# Altium PCB ControllerBoardV2PCB.PcbDoc
Units mm, origin at the board's own origin, x right, y up, seen from the top; angles counter-clockwise.
Board outline 55 x 90 mm, 2 copper layers (Top Layer, Bottom Layer); 39 components, 55 nets, 251 pads, 4 vias.
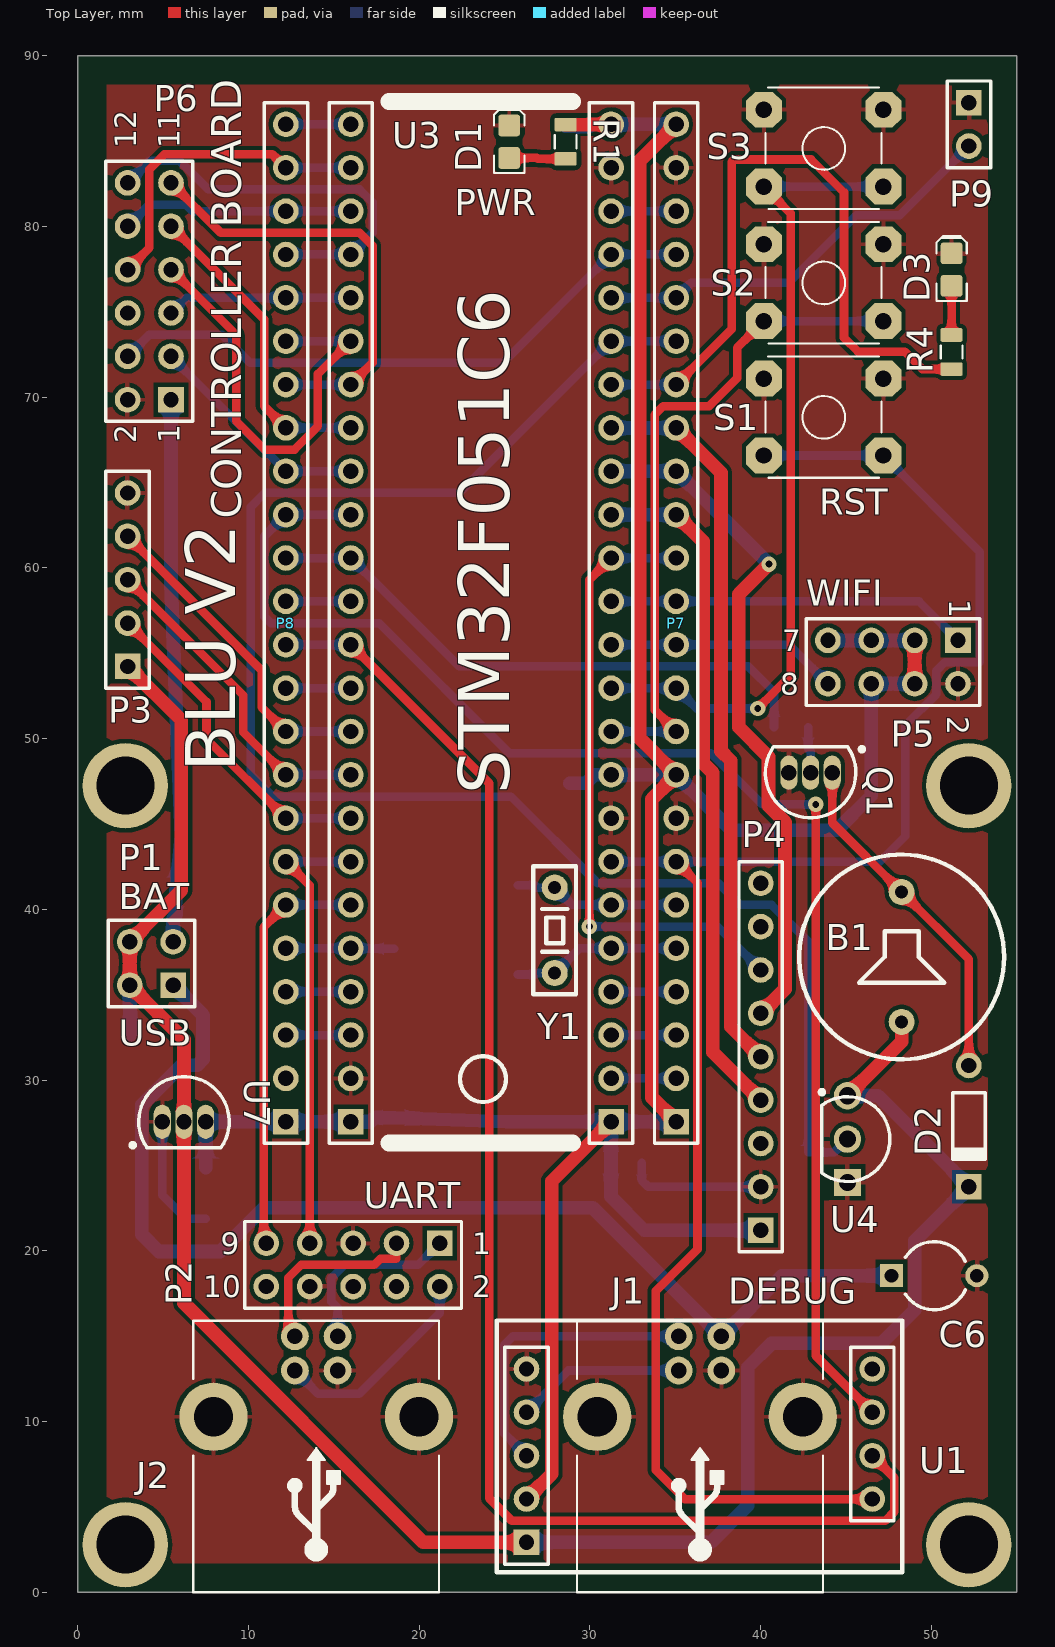
[diagram p0: Top Layer view]
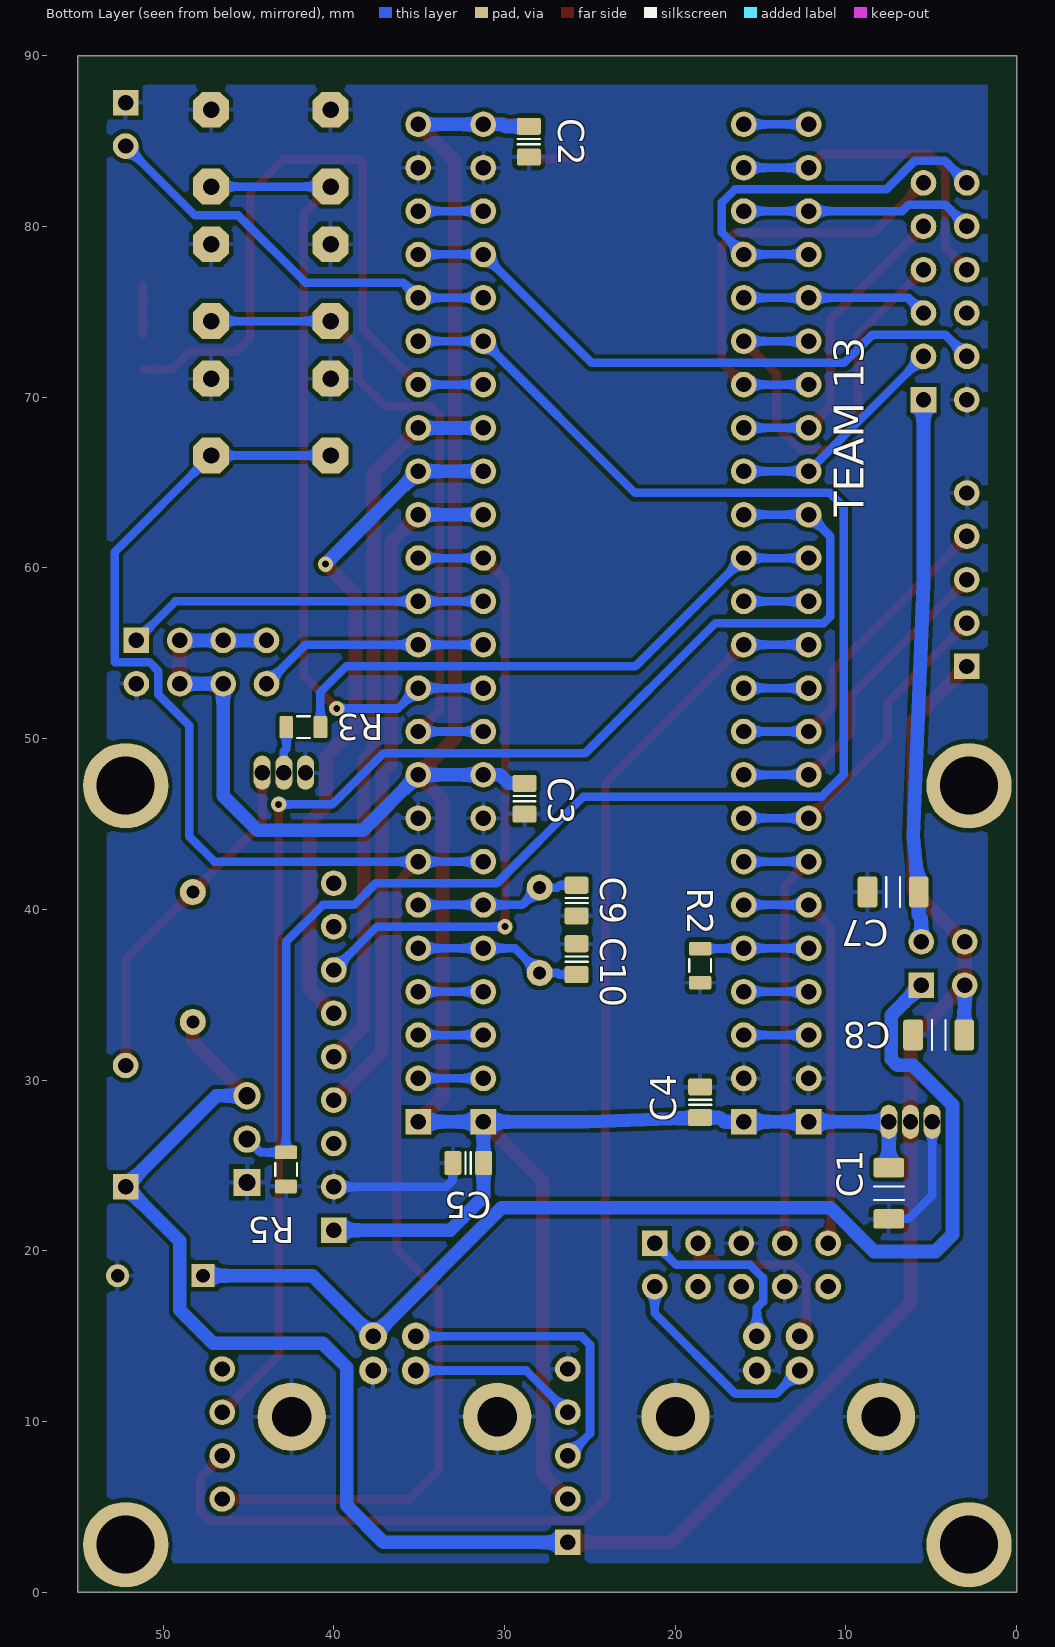
[diagram p1: Bottom Layer view, seen from below]

## Layer stack, top to bottom
Top Solder: solder mask 0.0102, Solder Resist, Dk 3.5
Top Layer: signal copper 0.0356
Dielectric 1: dielectric 0.32, FR-4, Dk 4.8
Bottom Layer: signal copper 0.0356
Bottom Solder: solder mask 0.0102, Solder Resist, Dk 3.5

## Board outline
0,0 55,0 55,90 0,90

## Design rules (kind name [scope] priority, off if disabled: settings)
Clearance [All] p1: gap=0.25
PolygonConnect [All] p1: connectstyle=Relief reliefconductorwidth=0.254 reliefentries=4 polygonreliefangle="90 Angle" airgapwidth=0.254
RoutingVias [All] p1: holewidth=0.4 width=0.9 viastyle="Through Hole" minholewidth=0.711 minwidth=1.27 maxholewidth=0.711 maxwidth=1.27
SMDNeckDown [All] p1: percent=100.000
SolderMaskExpansion [All] p1: expansion=0.102
Width Width_1 [(InNet('3V3') OR InNet('5V') OR InNet('5VPB') OR InNet('5VUSB') OR InNet('SPI2_CLK') OR InNet('SPI2_MISO') OR InNet('SPI2_MOSI'))] p1: maxlimit=1.5 minlimit=0.5 preferedwidth=0.8 minimp=50.000000 maximp=50.000000 favimp=50.000000
Width [All] p2: maxlimit=1.5 minlimit=0.3 preferedwidth=0.5 minimp=50.000000 maximp=50.000000 favimp=50.000000
30 further rules are at their usual default settings.

## Components (designator, comment, footprint, x,y, rotation, side; value= is the part's Value field where it differs from the comment)
B1 "BUZZER" HCM1206UX-G 48.26,37.211 r270 top
C1 "approved sub OK" CAPC3216X180N 7.493,23.368 r270 bottom
C2 "approved sub OK" CAPC2012X135N 28.575,84.963 r270 bottom
C3 "approved sub OK" CAPC2012X135N 28.829,46.482 r270 bottom
C4 "approved sub OK" CAPC2012X135N 18.542,28.702 r90 bottom
C5 "approved sub OK" CAPC2012X135N 32.131,25.146 r0 bottom
C6 "10µ" CAPR5-4X5 50.165,18.542 r0 top
C7 "approved sub OK" CAPC3216X180N 7.239,41.021 r0 bottom
C8 "approved sub OK" CAPC3216X180N 4.572,32.639 r0 bottom
C9 "approved sub OK" CAPC2012X135N 25.781,40.513 r270 bottom
C10 "approved sub OK" CAPC2012X135N 25.781,37.084 r90 bottom
D1 "3V3LED" LED-0805-K 25.273,84.963 r90 top
D2 "Diode 1N4448" DO-35 52.197,27.305 r270 top
D3 "INDLED" LED-0805-K 51.181,77.47 r90 top
J1 "USB-B - UART" USB_TypeB_Tyco 36.449,0 r90 top
J2 "USB-B - UART" USB_TypeB_Tyco 13.97,0 r90 top
P1 "POWER_HEADER" HDR2X2 5.588,35.56 r90 top
P2 "MCPUSBUART_HEADER" HDR2X5 21.209,20.447 r180 top
P3 "LNS_HEADER" HDR1X5 2.921,54.229 r90 top
P4 "GYRO_HEADER" HDR1X9 40.005,21.209 r90 top
P5 "WIFI_HEADER" HDR2X4 51.562,55.753 r180 top
P6 "POWERBOARD_HEADER" HDR2X6 5.461,69.85 r90 top
P7 "BREAKOUT_HEADER_LEFT" HDR1X24 35.052,27.559 r90 top
P8 "BREAKOUT_HEADER_RIGHT" HDR1X24 12.192,27.559 r90 top
P9 "LIGHTSENSOR_HEADER" HDR1X2 52.197,87.249 r270 top
Q1 "NPN" TO-226-AA 42.926,48.006 r90 top
R1 "Thick Film" RESC2012X70N 28.575,84.963 r270 top
R2 "Thick Film" RESC2012X70N 18.542,36.703 r90 bottom
R3 "Thick Film" RESC2012X70N 41.783,50.673 r0 bottom
R4 "Thick Film" RESC2012X70N 51.181,72.644 r90 top
R5 "Thick Film" RESC2012X70N 42.799,24.765 r270 bottom
S1 "SW_THT_PB_7.0mm" TACT-SWITCH-TS1170 43.688,68.834 r180 top
S2 "SW_THT_PB_7.0mm" TACT-SWITCH-TS1170 43.688,76.708 r180 top
S3 "SW_THT_PB_7.0mm" TACT-SWITCH-TS1170 43.688,84.582 r180 top
U1 "STM32F0DebuggerHdr" STM32F051C6_DbgrHdr 26.289,2.921 r180 top
U3 "STM32F051C6 Breakout Board" STM32F051C6BreakoutBoard 31.242,27.559 r90 top
U4 "LM35WidePin" TO-92Wide 45.085,26.543 r270 top
U7 "MCP1702-3302E/TO" TO-92-TO3 6.223,27.559 r270 top
Y1 "8MHz" 8MHZOSC 27.94,41.275 r270 top

## Footprints (in the part's own frame and the unit in brackets; to place one, negate y for a bottom-side part, rotate by r counter-clockwise, add the part's x,y. Pads: shape width x height; smd on the part's side, far side on the other; paste and mask are expansions set on the pad)
8MHZOSC [mil]
  round 60 hole 30: 1(196.85,0) 2(0,0)
  silkscreen extent -49,-49 246,49
CAPC2012X135N [mm] "Chip Capacitor, Body 2.0x1.2mm, EIA 0805, IPC Medium Density"
  round 0.254 on Mech15: 0(0,0)
  rrect25% 1x1.4 smd: 1(-0.9,0) 2(0.9,0)
  Top Layer pour cut-out: -0.675,0.7 -0.475,0.9 0.475,0.9 0.675,0.7 0.675,-0.7 0.475,-0.9 -0.475,-0.9 -0.675,-0.7
  silkscreen extent -0.15,-0.65 0.15,0.65, body extent -1.1,-0.72 1.1,0.73, height 1.34
CAPC3216X180N [mm] "Chip Capacitor, Body 3.2x1.6mm, 1.8mm H, EIA 1206, IPC Medium Density"
  round 0.508 on Mech15: 0(0,0)
  rrect25% 1.15x1.8 smd: 1(-1.5,0) 2(1.5,0)
  silkscreen extent -0.4,-0.88 0.4,0.88, body extent -1.7,-0.9 1.7,0.9, height 1.8
CAPR5-4X5 [mm] "Capacitor; 2 Leads"
  rect 1.35x1.35 hole 0.8: 1(-2.5,0)
  round 1.35 hole 0.8: 2(2.5,0)
  silkscreen extent -1.69,-2 1.82,2
DO-35 [mm] "Diode, Axial; Body 3.8 x 1.9 mm (LxDia. max), Lead Dia. 0.53 mm (max)"
  round 1.5 hole 0.9: 1(-3.55,0)
  rect 1.5x1.5 hole 0.9: 2(3.55,0)
  silkscreen extent -1.95,-0.95 2.05,0.95
HCM1206UX-G [mil]
  round 60 hole 30: 0(-149.61,0) 1(149.61,0)
  silkscreen extent -236,-236 236,236
HDR1X2 [mm] "Connector; Header; 2 Position"
  rect 1.5x1.5 hole 0.9: 1(0,0)
  round 1.5 hole 0.9: 2(2.54,0)
  silkscreen extent -1.27,-1.27 3.81,1.27
HDR1X5 [mm] "Connector; Header; 5 Position"
  rect 1.5x1.5 hole 0.9: 1(0,0)
  round 1.5 hole 0.9: 2(2.54,0) 3(5.08,0) 4(7.62,0) 5(10.16,0)
  silkscreen extent -1.27,-1.27 11.43,1.27
HDR1X9 [mm] "Connector; Header; 9 Position"
  rect 1.5x1.5 hole 0.9: 1(0,0)
  round 1.5 hole 0.9: 2(2.54,0) 3(5.08,0) 4(7.62,0) 5(10.16,0) 6(12.7,0) 7(15.24,0) 8(17.78,0) 9(20.32,0)
  silkscreen extent -1.27,-1.27 21.59,1.27
HDR1X24 [mm] "Connector; Header; 24 Position"
  rect 1.5x1.5 hole 0.9: 1(0,0)
  round 1.5 hole 0.9: 2(2.54,0) 3(5.08,0) 4(7.62,0) 5(10.16,0) 6(12.7,0) 7(15.24,0) 8(17.78,0) 9(20.32,0) 10(22.86,0) 11(25.4,0) 12(27.94,0) 13(30.48,0) 14(33.02,0) 15(35.56,0) 16(38.1,0) 17(40.64,0) 18(43.18,0) 19(45.72,0) 20(48.26,0) 21(50.8,0) 22(53.34,0) 23(55.88,0) 24(58.42,0)
  silkscreen extent -1.27,-1.27 59.69,1.27
HDR2X2 [mm] "Connector; Header; 2x2 Position"
  rect 1.5x1.5 hole 0.9: 1(0,0)
  round 1.5 hole 0.9: 2(0,2.54) 3(2.54,0) 4(2.54,2.54)
  silkscreen extent -1.27,-1.27 3.81,3.81
HDR2X4 [mm] "Connector; Header; 4x2 Position"
  rect 1.5x1.5 hole 0.9: 1(0,0)
  round 1.5 hole 0.9: 2(0,2.54) 3(2.54,0) 4(2.54,2.54) 5(5.08,0) 6(5.08,2.54) 7(7.62,0) 8(7.62,2.54)
  silkscreen extent -1.27,-1.27 8.89,3.81
HDR2X5 [mm] "Connector; Header; 5x2 Position"
  rect 1.5x1.5 hole 0.9: 1(0,0)
  round 1.5 hole 0.9: 2(0,2.54) 3(2.54,0) 4(2.54,2.54) 5(5.08,0) 6(5.08,2.54) 7(7.62,0) 8(7.62,2.54) 9(10.16,0) 10(10.16,2.54)
  silkscreen extent -1.27,-1.27 11.43,3.81
HDR2X6 [mm] "Connector; Header; 6x2 Position"
  rect 1.5x1.5 hole 0.9: 1(0,0)
  round 1.5 hole 0.9: 2(0,2.54) 3(2.54,0) 4(2.54,2.54) 5(5.08,0) 6(5.08,2.54) 7(7.62,0) 8(7.62,2.54) 9(10.16,0) 10(10.16,2.54) 11(12.7,0) 12(12.7,2.54)
  silkscreen extent -1.27,-1.27 13.97,3.81
LED-0805-K [mil]
  round 20 on Mech15: 0(0,0)
  rrect25% 50x50 smd: A(-37.5,0) K(37.5,0)
  Top Layer pour cut-out: -15,30 15,30 15,-30 -15,-30
  silkscreen extent -72,-35 77,35, body extent -39,-25 39,25, height 31
RESC2012X70N [mm] "Chip Resistor, Body 2.0x1.2mm, EIA 0805, IPC Medium Density"
  round 0.254 on Mech15: 0(0,0)
  rrect25% 0.8x1.3 smd: 1(-1,0) 2(1,0)
  Top Layer pour cut-out: -0.725,0.65 -0.525,0.85 0.525,0.85 0.725,0.65 0.725,-0.65 0.525,-0.85 -0.525,-0.85 -0.725,-0.65
  silkscreen extent -0.38,-0.64 0.38,0.64, body extent -1.1,-0.67 1.1,0.68, height 0.69
STM32F051C6_DbgrHdr [mm]
  rect 1.5x1.5 hole 0.9: 1(0,0)
  round 1.5 hole 0.9: 2(0,-2.54) 3(0,-5.08) 4(0,-7.62) 5(0,-10.16) 6(-20.25,-2.54) 7(-20.25,-5.08) 8(-20.25,-7.62) 9(-20.25,-10.16)
  silkscreen extent -22,-13 1.75,1.75
STM32F051C6BreakoutBoard [mm]
  rect 1.5x1.5 hole 0.9: 1(0,0) 48(0,15.25)
  round 1.5 hole 0.9: 2(2.54,0) 3(5.08,0) 4(7.62,0) 5(10.16,0) 6(12.7,0) 7(15.24,0) 8(17.78,0) 9(20.32,0) 10(22.86,0) 11(25.4,0) 12(27.94,0) 13(30.48,0) 14(33.02,0) 15(35.56,0) 16(38.1,0) 17(40.64,0) 18(43.18,0) 19(45.72,0) 20(48.26,0) 21(50.8,0) 22(53.34,0) 23(55.88,0) 24(58.42,0) 25(58.42,15.25) 26(55.88,15.25) 27(53.34,15.25) 28(50.8,15.25) 29(48.26,15.25) 30(45.72,15.25) 31(43.18,15.25) 32(40.64,15.25) 33(38.1,15.25) 34(35.56,15.25) 35(33.02,15.25) 36(30.48,15.25) 37(27.94,15.25) 38(25.4,15.25) 39(22.86,15.25) 40(20.32,15.25) 41(17.78,15.25) 42(15.24,15.25) 43(12.7,15.25) 44(10.16,15.25) 45(7.62,15.25) 46(5.08,15.25) 47(2.54,15.25)
  silkscreen extent -1.27,-1.27 59.75,16.52
TACT-SWITCH-TS1170 [mm] "Bondtact sealed TH tact switch"
  round 0.508 on Mech15: 0(0,0)
  oct 2.1x2.1 hole 0.965: 1(-3.5,-2.25) 1(3.5,-2.25) 2(-3.5,2.25) 2(3.5,2.25)
  silkscreen extent -3.4,-3.56 3.4,3.56, body extent -4.13,-3.25 4.13,3.25, height 7
TO-92-TO3 [mm] "TO, Flat Index; 3 In-Line, Axial Leads; Body Dia. 4.8mm; Leads 0.56 x 0.53 mm (max)"
  oval 2x1 hole 0.9: 1(0,-1.27) 2(0,0) 3(0,1.27)
  silkscreen extent -2.65,-3.13 1.52,2.65, body extent -2.66,-2.66 1.52,2.66, height 5.33
TO-92Wide [mm]
  round 1.6 hole 1: 1(-2.54,0) 2(0,0)
  rect 1.6x1.6 hole 1: 3(2.54,0)
  silkscreen extent -2.87,-1.62 2.48,2.48, body extent -2.5,-1.5 2.5,2.5, height 6.86
TO-226-AA [mm] "TO, Flat Index; 3 In-Line, Axial Leads; Body Dia. 4.8mm; Leads 0.55 x 0.51 mm (max)"
  oval 2x1 hole 0.9: 1(0,-1.27) 2(0,0) 3(0,1.27)
  silkscreen extent -2.65,-3.13 1.52,2.65, body extent -2.66,-2.66 1.52,2.66, height 5.33
USB_TypeB_Tyco [mm]
  round 1.626 hole 0.914: 1(14.99,-1.25) 2(14.99,1.25) 3(12.99,1.25) 4(12.99,-1.25)
  round 4 hole 2.3: MH(10.28,-6.02) MH(10.28,6.02)
  silkscreen extent 0,-7.2 15.9,7.2, body extent 0,-7.19 15.7,7.19, height 11.5

## Part data
B1: library part HCM1206UX-G, "2.3KHz Internally Driven Buzzer"
C1 C7 C8: library part CAPC_10u_1206_16V, "Capacitor SMD Cer 10uF 10% 16V X7R 1206"
C2 C3 C4 C5 C9 C10: library part CAPC_1n8_50V_0805, "Capacitor SMD Cer 1.8nF 10% 50V X7R 0805"
C6: library part CAPE_220u_16V_THD_2.5mmLS, "Capacitor THT Alum Elec 220uF 20% 16V 2.5mmLS"
D1 D3: library part LED_SMD_Green_0805_6mcd, "LED, 0805 SMD, Green"
D2: "High Conductance Fast Diode"
J1 J2: library part USB_TypeB, "Connector THT Type B USB connector"
P1: library part "Header 2X2", "Header, 2-Pin, Dual row"
P2: library part "Header 5X2", "Header, 5-Pin, Dual row"
P3: library part "Header 5", "Header, 5-Pin"
P4: library part "Header 9", "Header, 9-Pin"
P5: library part "Header 4X2", "Header, 4-Pin, Dual row"
P6: library part "Header 6X2", "Header, 6-Pin, Dual row"
P7 P8: library part "Header 24", "Header, 24-Pin"
P9: library part "Header 2", "Header, 2-Pin"
Q1: "NPN Bipolar Transistor"
R1 R2 R3 R4 R5: library part RES_150R_0805_5%, "Resistor SMD chip 150 Ohm 0.125W 5% 0805"
S1 S2 S3: "Switch, tact, 7.0mm stem"
U3: library part STM32F051C6Brk
U4: library part LM35Big
U7: library part CMP-0136-00017-1, "250 mA Low Quiescent Current LDO Regulator, 3-Pin TO-92, Extended TemperatureBAG"
Y1: library part XTAL, "Crystal Oscillator"

## Free pads (board coordinates)
  round 5 hole 3.4: 0(2.794,2.794) 0(2.794,47.244) 0(52.197,2.794) 0(52.197,47.244)

## Via types
v1: diameter 0.9, hole 0.4, Top Layer to Bottom Layer, 4 vias

## Nets (pads, with @x,y where several pads share a name; then routed paths per layer and width w, separated by ;. In a path a pad name is that pad's centre, name@x,y a point inside that pad or via, vN(x,y) a via of type N, cw(c..) or ccw(c..) an arc to the next point about the centre after c; other vN are vias at no path point)
3V3: C1.1 C2.1 C3.1 C4.1 C5.1 P4.1 P5.3 P5.4 P5.5 P5.6 P5.7 P7.1 P7.9 P7.24 P8.1 R1.1 U1.2 U3.1 U3.9 U3.24 U3.48 U7.3 | length 175.8
  Top Layer w0.8: U1.2 27.762,6.934 27.762,24.079 U3.1 ; R1.1 29.896,85.963 29.912,85.979 U3.24 ; P7.1 33.63,28.981 33.63,46.457 P7.9 32.902,50.029 32.902,83.829 P7.24 ; P5.4 P5.3
  Bottom Layer w0.8: C1.1 U7.3 P8.1 U3.48 17.145,27.559 17.388,27.802 C4.1 25.135,27.559 U3.1 ; C2.1 29.997,85.863 30.113,85.979 U3.24 P7.24 ; C3.1 29.769,47.382 30.266,47.879 U3.9 P7.9 38.303,44.628 44.45,44.628 46.482,46.66 P5.6 P5.4 ; P7.1 U3.1 ; P4.1 33.185,21.209 31.231,23.163 C5.1 31.231,26.34 31.242,26.351 U3.1 ; P5.7 P5.5 P5.3
5V: B1.1 C8.1 D2.2 P1.2 P1.4 P3.1 U1.1 U4.1 U7.2 | length 126.6
  Top Layer w0.8: P3.1 6.071,51.079 6.071,41.123 P1.4 P1.2 6.223,32.385 U7.2 6.223,16.942 20.244,2.921 U1.1 ; U4.1 48.26,32.258 B1.1
  Bottom Layer w0.8: P1.2 3.048,34.111 3.072,34.087 C8.1 ; U1.1 37.084,2.921 39.243,5.08 39.243,13.183 40.64,14.58 47.066,14.58 49.022,16.535 49.022,20.58 D2.2 46.869,29.083 U4.1
5VPB: C7.1 P1.3 P6.1 | length 31.8
  Bottom Layer w0.8: P6.1 5.461,59.08 6.071,44.274 C7.1 5.739,39.623 5.588,39.472 P1.3
5VUSB: C6.1 J1.1 P1.1 | length 67.3
  Bottom Layer w0.8: P1.1 7.341,33.807 7.341,31.217 6.985,30.861 6.071,30.861 3.759,28.55 3.759,20.955 4.75,19.964 8.357,19.964 10.922,22.53 30.159,22.53 J1.1 41.251,18.542 C6.1
BLU_LEDS: P6.4 P7.21 U3.21 | length 36
  Bottom Layer w0.5: P6.4 4.191,73.66 8.458,73.66 10.109,72.009 24.892,72.009 U3.21 P7.21
BOOT0: P8.5 R2.2 U3.44 | length 6.4
  Bottom Layer w0.5: P8.5 U3.44 17.247,37.719 17.263,37.703 R2.2
BUZZER_SIG: P8.14 R3.1 U3.35 | length 33.9
  Bottom Layer w0.5: P8.14 U3.35 22.342,54.229 39.277,54.229 40.783,52.723 R3.1
DEBUGUSB_DM: J1.2 U1.3 | length 17.4
  Bottom Layer w0.5: U1.3 24.994,9.296 24.994,14.503 25.48,14.99 J1.2
DEBUGUSB_DP: J1.3 U1.4 | length 9.9
  Bottom Layer w0.5: U1.4 28.738,12.99 J1.3
GND: C1.2 C2.2 C3.2 C4.2 C5.2 C6.2 C7.2 C8.2 C9.2 C10.2 D1.K D3.K J1.4 J1.MH J2.4 J2.MH P2.5 P2.8 P3.5 P4.2 P5.2 P6.2 P7.8 P7.23 P8.2 P9.1 Q1.3 R2.1 R5.2 S1.1 S2.1 S3.1 U1.5 U3.8 U3.23 U3.47 U4.3 U7.1 | length 15.6
  Bottom Layer w0.5: U7.1 4.953,23.265 6.35,21.868 C1.2 ; C5.2 33.031,24.13 33.412,23.749 P4.2
LNCH_EN: P6.8 P8.23 U3.26 | length 18.9
  Top Layer w0.5: P6.8 4.191,78.74 4.191,83.337 5.08,84.226 11.405,84.226 P8.23
  Bottom Layer w0.5: P8.23 U3.26
LNCHSIG_F: P6.10 P8.22 U3.27 | length 13.8
  Bottom Layer w0.5: P6.10 4.191,81.28 6.325,81.28 6.706,80.899 P8.22 U3.27
LNCHSIG_R: P6.12 P8.21 U3.28 | length 23.3
  Bottom Layer w0.5: P6.12 4.216,83.845 5.969,83.845 7.645,82.169 16.51,82.169 17.272,81.407 17.272,79.639 U3.28 P8.21
LNS_L_SIG: P3.4 P8.10 U3.39 | length 19.1
  Top Layer w0.5: P3.4 10.77,54 10.77,51.841 P8.10
  Bottom Layer w0.5: P8.10 U3.39
LNS_R_SIG: P3.3 P8.9 U3.40 | length 19.1
  Top Layer w0.5: P3.3 9.703,52.527 9.703,50.368 P8.9
  Bottom Layer w0.5: P8.9 U3.40
LS_SIG: P7.20 P9.2 U3.20 | length 24.6
  Bottom Layer w0.5: U3.20 P7.20 35.941,76.708 41.656,76.708 45.593,80.645 48.133,80.645 P9.2
MTREN: P6.3 P8.16 U3.33 | length 13.3
  Bottom Layer w0.5: P6.3 P8.16 U3.33
MTRSIG_LF: P6.9 P8.17 U3.32 | length 18.4
  Top Layer w0.5: P6.9 10.922,74.549 10.922,69.469 P8.17
  Bottom Layer w0.5: P8.17 U3.32
MTRSIG_LR: P6.7 P8.19 U3.30 | length 26.1
  Top Layer w0.5: P6.7 9.296,73.635 9.296,68.58 10.947,66.929 12.7,66.929 14.072,68.301 14.072,71.359 U3.30
  Bottom Layer w0.5: P8.19 U3.30
MTRSIG_RF: P6.11 P8.18 U3.31 | length 25.8
  Top Layer w0.5: P6.11 8.382,79.629 16.51,79.629 17.272,78.867 17.272,72.019 U3.31
  Bottom Layer w0.5: P8.18 U3.31
MTRSIG_RR: P6.5 P8.20 U3.29 | length 10.9
  Bottom Layer w0.5: P6.5 6.35,75.819 P8.20 U3.29
NetB1_-: B1.0 D2.1 Q1.1 | length 20.5
  Top Layer w0.5: Q1.1 44.196,45.075 B1.0 52.197,37.074 D2.1
NetD1_A: D1.A R1.2 | length 3.3
  Top Layer w0.5: D1.A 26.899,84.01 26.946,83.963 R1.2
NetD3_A: D3.A R4.2 | length 2.9
  Top Layer w0.5: R4.2 D3.A
NetJ2_1: J2.1 P2.1 | length 10.8
  Bottom Layer w0.5: J2.1 15.22,16.662 14.859,17.023 14.859,18.415 15.621,19.177 19.939,19.177 P2.1
NetJ2_2: J2.2 P2.3 | length 11.3
  Top Layer w0.5: J2.2 12.319,15.391 12.319,18.415 13.081,19.177 17.374,19.177 17.729,19.533 18.669,19.533 P2.3
NetJ2_3: J2.3 P2.2 | length 12.6
  Bottom Layer w0.5: J2.3 14.077,11.633 16.485,11.633 21.209,16.358 P2.2
NetQ1_2: Q1.2 R3.2 | length 2.7
  Bottom Layer w0.5: R3.2 42.783,49.394 42.926,49.251 Q1.2
NRST: P7.7 S1.2 U1.6 U3.7 | length 103
  Top Layer w0.5: P7.7 36.302,41.549 36.302,20.097 33.858,17.653 33.858,7.163 35.56,5.461 U1.6
  Bottom Layer w0.5: U3.7 P7.7 46.99,42.799 48.463,44.272 48.463,50.775 50.292,52.603 50.292,53.975 50.8,54.483 52.832,54.483 52.832,60.94 47.188,66.584 S1.2@40.188,66.584
OSC_IN: C10.1 P7.5 U3.5 Y1.1 | length 9.9
  Bottom Layer w0.5: C10.1 26.797,36.184 26.888,36.275 Y1.1 29.384,37.719 U3.5 P7.5
OSC_OUT: C9.1 P7.6 U3.6 Y1.2 | length 9.7
  Bottom Layer w0.5: C9.1 26.772,41.413 26.91,41.275 Y1.2 28.956,40.259 U3.6 P7.6
PA0: P7.10 S2.2 U3.10 | length 39.6
  Top Layer w0.5: P7.10 33.802,51.669 33.802,68.981 34.29,69.469 36.982,69.469 38.633,71.12 38.633,72.903 S2.2@40.188,74.458
  Bottom Layer w0.5: U3.10 P7.10 ; S2.2@40.188,74.458 S2.2@47.188,74.458
PA1: P7.11 S3.2 U3.11 | length 48.1
  Top Layer w0.5: v1(39.827,51.765) 41.758,53.696 41.758,80.762 S3.2@40.188,82.332
  Bottom Layer w0.5: U3.11 P7.11 36.246,51.765 v1(39.827,51.765) ; S3.2@40.188,82.332 S3.2@47.188,82.332
PA15: P8.11 U3.38 | length 3.8
  Bottom Layer w0.5: P8.11 U3.38
PB0: P7.18 R4.1 U3.18 | length 41.2
  Top Layer w0.5: P7.18 38.303,73.99 38.303,83.795 38.43,83.922 42.951,83.922 44.882,81.991 44.882,73.482 45.695,72.669 48.438,72.669 49.463,71.644 R4.1
  Bottom Layer w0.5: U3.18 P7.18
PB1: P7.19 R5.1 U3.19 U4.2 | length 96.3
  Bottom Layer w0.5: P7.19 U3.19 22.352,64.389 10.947,64.389 10.135,63.576 10.135,47.904 11.43,46.609 25.375,46.609 30.455,41.529 37.541,41.529 38.811,40.259 40.64,40.259 42.799,38.1 R5.1 44.307,25.765 U4.2
PB8: P8.4 U3.45 | length 3.8
  Bottom Layer w0.5: P8.4 U3.45
PB9: P8.3 U3.46 | length 3.8
  Bottom Layer w0.5: P8.3 U3.46
PB11: P7.22 U3.22 | length 3.8
  Bottom Layer w0.5: U3.22 P7.22
PB12: P8.24 U3.25 | length 3.8
  Bottom Layer w0.5: P8.24 U3.25
PC13: P7.2 U3.2 | length 3.8
  Bottom Layer w0.5: U3.2 P7.2
PC14: P7.3 U3.3 | length 3.8
  Bottom Layer w0.5: U3.3 P7.3
PC15: P7.4 U3.4 | length 3.8
  Bottom Layer w0.5: U3.4 P7.4
PF7: P8.13 U3.36 | length 3.8
  Bottom Layer w0.5: P8.13 U3.36
PPP_SIG: P3.2 P8.8 U3.41 | length 19.1
  Top Layer w0.5: P3.2 7.544,52.146 7.544,49.987 P8.8
  Bottom Layer w0.5: P8.8 U3.41
SPI2_CLK: P4.4 P7.15 U3.15 | length 40.2
  Top Layer w0.8: P7.15 36.627,61.544 36.627,48.565 37.202,47.99 37.202,31.632 P4.4
  Bottom Layer w0.8: U3.15 P7.15
SPI2_CS: P4.7 P7.14 U3.14 | length 37
  Top Layer w0.5: v1(29.972,38.989) 29.972,59.309 U3.14
  Bottom Layer w0.5: v1(29.972,38.989) 37.465,38.989 P4.7 ; U3.14 P7.14
SPI2_MISO: P4.6 P7.16 U3.16 | length 40.2
  Top Layer w0.8: P4.6 41.427,35.331 41.427,45.11 40.462,46.076 40.462,48.93 38.727,50.665 38.727,58.463 v1(40.488,60.223)
  Bottom Layer w0.8: U3.16 P7.16 v1(40.488,60.223)
SPI2_MOSI: P4.5 P7.17 U3.17 | length 42.7
  Top Layer w0.8: P7.17 37.677,65.574 37.677,49.275 38.252,48.7 38.252,33.122 P4.5
  Bottom Layer w0.8: U3.17 P7.17
T_SWCLK: P8.12 U1.7 U3.37 | length 85.5
  Top Layer w0.5: U3.37 24.105,47.386 24.105,5.512 25.425,4.191 47.307,4.191 47.828,4.712 47.828,6.712 U1.7
  Bottom Layer w0.5: P8.12 U3.37
T_SWDIO: P8.15 U1.8 U3.34 | length 84.1
  Top Layer w0.5: v1(43.231,46.152) 43.231,13.849 U1.8
  Bottom Layer w0.5: U3.34 P8.15 10.922,61.849 10.922,57.15 11.303,56.769 17.653,56.769 25.273,49.149 37.084,49.149 40.081,46.152 v1(43.231,46.152)
USB_RX: P2.9 P8.6 U3.43 | length 24.3
  Top Layer w0.5: P2.9 10.922,20.447 10.897,20.472 10.897,38.964 P8.6
  Bottom Layer w0.5: P8.6 U3.43
USB_TX: P2.7 P8.7 U3.42 | length 26.7
  Top Layer w0.5: P8.7 13.589,41.402 P2.7
  Bottom Layer w0.5: P8.7 U3.42
WIFI_RXD: P5.1 P7.13 U3.13 | length 21.3
  Bottom Layer w0.5: U3.13 P7.13 49.276,58.039 P5.1
WIFI_TXD: P5.8 P7.12 U3.12 | length 13.6
  Bottom Layer w0.5: U3.12 P7.12 41.656,55.499 P5.8
pads on no net: C1.0 C2.0 C3.0 C4.0 C5.0 C7.0 C8.0 C9.0 C10.0 D1.0 D3.0 P2.4 P2.6 P2.10 P4.3 P4.8 P4.9 P6.6 R1.0 R2.0 R3.0 R4.0 R5.0 S1.0 S2.0 S3.0 U1.9

## Polygon pours and split planes (outlines as drawn)
GND on Bottom Layer "Bottom Layer-GND" (solid, pour order 2): 1.3,88.7 1.3,1.3 53.594,1.3 53.7,1.406 53.7,88.7
GND on Top Layer "Top Layer-GND" (solid, pour order 4): 1.3,88.7 1.3,1.3 53.7,1.3 53.7,88.7

## Silkscreen, mask and mechanical layers (free items; w line width, h text height)
Top Overlay:
  text "PWR" at 22.098,80.645 h1.52
  text "RST" at 43.434,63.119 h1.52
  text "CONTROLLER BOARD" at 10.16,62.865 h3 r90
  text "WIFI" at 42.672,57.785 h1.52
  text "BLU V2" at 10.205,48.047 h5 r90
  text "STM32F051C6" at 25.273,46.736 h3 r90
  text "BAT" at 2.413,40.005 h1.52
  text "USB" at 2.413,32.004 h1.52
  text "UART" at 16.764,22.479 h1.52
  text "DEBUG" at 38.1,16.891 h1.52
Bottom Overlay:
  text "TEAM 13" at 8.382,62.992 h3 r270
Mechanical 1:
  the board outline again, w0.3
Drill Drawing:
  text ".LEGEND" at 60.08,5.08 h1.52
  text "Drill Drawing." at 60.08,2.54 h1.52

## Dimensions
0,0 to 55,0 on Mechanical 1
0,0 to 0,90 on Mechanical 1

## Text inside footprints (layer, text, board x,y; h text height)
P2: Top Overlay "2" at 23.114,17.272 h1.27; Top Overlay "1" at 23.114,19.812 h1.27; Top Overlay "9" at 8.382,19.812 h1.27; Top Overlay "10" at 7.366,17.272 h1.27
P5: Top Overlay "8" at 41.148,52.578 h1.27; Top Overlay "7" at 41.275,55.118 h1.27; Top Overlay "1" at 51.054,58.166 h1.27 r270; Top Overlay "2" at 50.927,51.308 h1.27 r270
P6: Top Overlay "2" at 3.429,67.31 h1.27 r90; Top Overlay "1" at 5.969,67.31 h1.27 r90; Top Overlay "1" at 5.969,84.582 h1.27 r90; Top Overlay "1" at 5.969,85.598 h1.27 r90; Top Overlay "12" at 3.429,84.582 h1.27 r90